# EAGLE board Open Ephys EIB Omnetics 2x32 3 fibers (EAGLE 6.4)
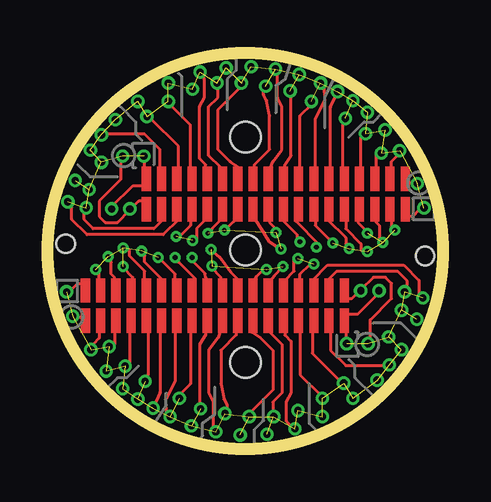
[diagram p0: board, top side]
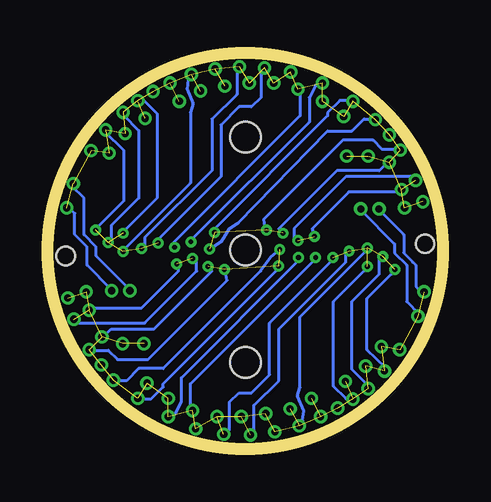
[diagram p1: board, bottom side, seen from below]

No outline drawn. Coordinates in mm, seen from the top.
Copper layers (1*16): Top 0.035mm / dielectric 1.5mm / Bottom 0.035mm
Design rules "default": minimum track width 5mil, minimum drill 10mil, track to track 5mil, track to pad 5mil, pad to pad 5mil, via to via 5mil, smd to smd 8mil, copper to edge 10mil, drill to drill 8mil, minimum pad ring 5mil, minimum via ring 5mil, stop-mask expansion 4mil, vias tented up to drill 0mil, thermal gap 10mil
Holes 1.27 mm at 11.3,22.99 11.3,27.69 11.3,18.29
Holes 0.76 mm at 3.81,23.24 18.8,22.73
Milling: area 3.1,14.7 to 19.5,31.2

## Placement (x,y rotation side)
E$1  [OMNETICS_36_AA_GS]  12.57,25.31 180 top
E$2  [OMNETICS_36_AA_GS]  10.03,20.66 0 top

## Library data of the parts
E$1 E$2 = voigts

## Tracks (layer width: path | path; a pad name or v marks a point on that pad's centre or on a via)
S$1  (via drill 0.3)
  other vias: 6.49,24.7
S$2  (via drill 0.2)  (1 unrouted)
  other vias: 8.42,23.55 9.11,23.37
S$3  (via drill 0.3)  (35 unrouted)
  other vias: 18.76,24.74 18.48,25.75 17.74,27.13 16.98,27.02 17.13,27.99 16.32,27.84 16.4,28.73 15.48,28.47 15.79,29.21 15.15,29.59 14.44,29.95 14.06,29.18 13.55,30.3 13.17,29.61 12.56,30.53 12.15,29.82 11.54,30.63 11.14,29.95 10.5,30.58 10.12,29.95 9.41,30.4 9.11,29.69 8.09,29.95 8.09,29.18 6.82,29.18 7.2,28.55 5.88,28.42 5.3,27.79 4.84,27.15 5.3,26.64 4.2,25.88 4.79,25.5 3.9,24.99 4.66,24.74 6.18,26.9 7.07,26.9
S$4  (via drill 0.2)  (5 unrouted)
  other vias: 17.54,23.81 16.39,23.68 17.03,23.3 16.39,22.92 15.63,23.04 14.95,23.27
S$5  (via drill 0.2)
  other vias: 14.26,23.09
S$6  (via drill 0.3)
  other vias: 5.73,24.7
S$7
  Top 0.127: 7.11,26.29 7.11,26.92
S$8
  Top 0.127: 6.1,26.8 6.1,25.91 5.21,25.02 5.21,24.38 5.46,24.13 5.97,24.13 6.48,24.64
S$9  (via drill 0.3)
  other vias: 16.88,21.28
S$10
  Top 0.127: 11.73,24.23 11.96,23.88 12.29,23.34 12.78,23.01
S$11
  Top 0.127: 12.32,24.26 12.32,24.13 12.7,23.75 12.65,23.7
S$12
  Top 0.127: 12.83,24.26 13.46,23.62 13.46,23.37
S$13
  Top 0.127: 13.41,24.18 14.35,23.24
S$14
  Top 0.127: 14.22,24.26 14.22,24 14.86,23.37 14.99,23.37
S$15
  Top 0.127: 10.92,24.26 10.79,24.16 10.54,23.9 10.49,23.8
S$16
  Top 0.127: 10.29,24.26 9.91,23.88 9.83,23.72
S$17  (via drill 0.3)
  other vias: 16.12,21.28
S$18  (via drill 0.2)  (1 unrouted)
  other vias: 14.16,22.4 13.5,22.63
S$19
  Top 0.127: 9.65,24.26 9.27,23.88 9.27,23.37
S$20  (via drill 0.2)
  other vias: 9.08,22.68
S$21
  Top 0.127: 9.02,24.26 9.02,24 8.59,23.57
S$22  (via drill 0.2)
  other vias: 8.37,22.68
S$23  (via drill 0.2)  (5 unrouted)
  other vias: 5.07,22.17 6.21,22.3 5.58,22.7 6.21,23.06 6.97,22.93 7.66,22.68
S$24
  Top 0.127: 8.51,24.26 7.87,23.62 4.7,23.62 4.06,24.26 4.06,24.89
S$25
  Top 0.127: 14.73,24.26 15.49,23.5 15.49,23.24
S$26
  Top 0.127: 7.87,24.26 7.49,23.88 4.95,23.88 4.57,24.26 4.57,24.51
S$27  (via drill 0.2)  (3 unrouted)
  other vias: 9.92,22.32 9.87,23.01 12.18,22.17 12.87,22.3
S$28  (via drill 0.3)  (35 unrouted)
  other vias: 3.85,21.24 4.1,20.22 4.86,18.82 5.63,18.95 5.5,17.93 6.29,18.14 6.18,17.2 7.12,17.5 6.82,16.77 7.45,16.38 8.17,16.03 8.55,16.79 9.05,15.65 9.44,16.36 10.07,15.39 10.45,16.16 11.09,15.27 11.47,16.03 12.2,15.29 12.48,16.03 13.37,15.52 13.5,16.28 14.52,16.03 14.52,16.79 15.79,16.79 15.4,17.43 16.8,17.55 17.31,18.19 17.82,18.82 17.28,19.36 18.45,20.09 17.82,20.47 18.71,20.98 17.95,21.24 16.42,19.08 15.53,19.08
S$29
  Top 0.127: 18.54,24.64 18.29,24.38 18.03,24.38
S$30
  Top 0.127: 18.54,25.78 18.03,25.78
S$31
  Top 0.127: 11.05,21.72 10.69,22.07 10.24,22.68 9.88,22.99
S$32
  Top 0.127: 10.29,21.72 10.29,21.84 9.91,22.23 9.91,22.48
S$33
  Top 0.127: 9.78,21.72 9.65,21.84 9.63,22 9.12,22.5
S$34
  Top 0.127: 9.22,21.77 8.51,22.48
S$35
  Top 0.127: 8.38,21.72 8.38,21.97 7.75,22.61 7.62,22.61
S$36
  Top 0.127: 11.68,21.72 11.79,21.89 12.04,22.15 12.14,22.2
S$37
  Top 0.127: 12.17,21.49 12.52,21.92 12.85,22.28
S$38
  Top 0.127: 12.95,21.72 13.34,22.1 13.34,22.61
S$39
  Top 0.127: 13.59,21.72 13.59,21.97 14.02,22.4
S$40
  Top 0.127: 14.1,21.72 14.73,22.35 17.91,22.35 18.54,21.72 18.54,21.08
S$41
  Top 0.127: 7.87,21.72 7.11,22.48 7.11,22.73
S$42
  Top 0.127: 14.73,21.72 15.11,22.1 17.65,22.1 18.03,21.72 18.03,21.46
S$43
  Top 0.127: 4.06,21.34 4.32,21.59 4.57,21.59
S$44  (via drill 0.2)  (3 unrouted)
  other vias: 12.59,23.7 12.79,23.02 10.43,23.81 9.74,23.68
S$45
  Top 0.127: 4.06,20.19 4.57,20.19
S$46
  Top 0.127: 15.49,20.95 15.75,20.95 16,21.21
S$47
  Top 0.127: 7.11,21.72 7.11,22.1 6.48,22.73 6.48,22.99 6.35,23.11
S$48
  Top 0.127: 6.6,21.72 6.6,21.84 6.22,22.23
S$49
  Top 0.127: 5.84,21.72 5.84,21.84 5.71,21.97 5.71,22.48
S$50
  Top 0.127: 5.21,21.72 5.21,22.1
S$51
  Top 0.127: 5.21,19.68 5.21,19.3 4.95,19.05
S$52
  Top 0.127: 5.84,19.68 5.84,19.05 5.71,18.92
S$53
  Top 0.127: 6.48,19.81 6.48,18.29 6.35,18.16
S$54
  Top 0.127: 7.24,19.56 7.24,17.78 6.99,17.53
S$55
  Top 0.127: 7.75,19.68 7.75,17.04 7.47,16.43
S$56
  Top 0.127: 8.38,19.56 8.38,17.53 7.98,16.74 8,16.13
S$57
  Top 0.127: 9.02,19.56 9.02,17.4 8.51,16.89
S$58
  Top 0.127: 9.65,19.68 9.65,19.43 9.4,19.05 9.4,16.64 9.53,16.38
S$59
  Top 0.127: 10.29,19.68 10.16,19.3 9.78,18.8 9.78,17.02 9.96,16.64 9.96,15.49
S$60
  Top 0.127: 10.92,19.68 10.92,19.43 10.29,18.8 10.29,17.4 10.41,16.76 10.54,16.51 10.54,16.26
S$61
  Top 0.127: 11.56,19.56 11.94,19.3 12.45,18.8 12.45,17.14 11.56,16.26
S$62
  Top 0.127: 12.32,19.56 12.83,19.05 12.83,17.02 12.45,16.64 12.45,16.13
S$63
  Top 0.127: 12.83,19.68 12.95,19.68 12.95,19.43 13.21,19.18 13.21,17.02 13.01,16.64 13.01,15.88 13.21,15.62
S$64
  Top 0.127: 13.59,19.56 13.59,17.78 14.48,16.89
S$65
  Top 0.127: 14.1,19.68 14.1,18.67 15.24,17.53
S$66
  Top 0.127: 14.86,19.56 14.86,18.8 15.49,18.16 17.14,18.16
S$67
  Bottom 0.127: 5.44,18.06 6.22,18.82 6.22,20.95 5.21,21.97
S$68
  Top 0.127: 9.02,26.42 9.02,28.19 8.13,29.08
S$69
  Top 0.127: 7.11,25.02 6.86,25.02 6.6,24.77
S$70
  Bottom 0.127: 6.22,17.27 6.22,17.37 6.86,18.01 6.86,20.83 5.71,21.97 5.71,22.61
S$71
  Bottom 0.127: 6.86,16.79 7.11,16.79 7.62,17.3 7.62,20.83 6.22,22.23
S$72
  Top 0.127: 15.49,24.26 15.49,23.88 16.13,23.24 16.13,22.99 16.26,22.86
S$73
  Top 0.127: 16,24.26 16,24.13 16.38,23.75
S$74
  Top 0.127: 16.76,24.26 16.76,24.13 16.89,24 16.89,23.5
S$75
  Top 0.127: 17.4,24.26 17.4,23.88
S$76
  Top 0.127: 17.4,26.29 17.4,26.67 17.65,26.92
S$77
  Top 0.127: 16.76,26.29 16.76,26.92 16.89,27.05
S$78
  Top 0.127: 16.13,26.16 16.13,27.69 16.26,27.81
S$79
  Top 0.127: 15.37,26.42 15.37,28.19 15.62,28.45
S$80
  Top 0.127: 14.86,26.29 14.86,28.93 15.14,29.54
S$81
  Top 0.127: 14.22,26.42 14.22,28.45 14.63,29.23 14.61,29.84
S$82
  Top 0.127: 13.59,26.42 13.59,28.57 14.1,29.08
S$83
  Top 0.127: 12.95,26.29 12.95,26.54 13.21,26.92 13.21,29.34 13.08,29.59
S$84
  Top 0.127: 12.32,26.29 12.45,26.67 12.83,27.18 12.83,28.96 12.65,29.34 12.65,30.48
S$85
  Bottom 0.127: 9.02,15.88 8.91,15.88 8.87,16.28 9.12,16.89 9.02,17.25 9.02,20.19 6.22,22.99
S$86
  Top 0.127: 11.68,26.29 11.68,26.54 12.32,27.18 12.32,28.57 12.19,29.21 12.06,29.46 12.06,29.72
S$87
  Top 0.127: 11.05,26.42 10.67,26.67 10.16,27.18 10.16,28.83 11.05,29.72
S$88
  Top 0.127: 10.29,26.42 9.78,26.92 9.78,28.96 10.16,29.34 10.16,29.84
S$89
  Top 0.127: 9.78,26.29 9.65,26.29 9.65,26.54 9.4,26.8 9.4,28.96 9.6,29.34 9.6,30.1 9.4,30.35
S$90
  Top 0.127: 8.51,26.29 8.51,27.3 7.37,28.45
S$91
  Top 0.127: 7.75,26.42 7.75,27.18 7.11,27.81 5.46,27.81
S$92
  Bottom 0.127: 10.95,15.37 10.95,16.51 9.91,17.53 9.91,19.68 7.11,22.48 7.11,22.86
S$93
  Bottom 0.127: 17.17,27.91 16.38,27.15 16.38,25.02 17.4,24
S$94
  Bottom 0.127: 16.38,28.7 16.38,28.6 15.75,27.96 15.75,25.15 16.89,24 16.89,23.37
S$95
  Bottom 0.127: 15.75,29.18 15.49,29.18 14.99,28.68 14.99,25.15 16.38,23.75
S$96
  Bottom 0.127: 13.59,30.1 13.69,30.1 13.74,29.69 13.49,29.08 13.59,28.73 13.59,25.78 16.38,22.99
S$97
  Bottom 0.127: 11.66,30.61 11.66,29.46 12.7,28.45 12.7,26.29 15.49,23.5 15.49,23.11
S$98
  Bottom 0.127: 10.54,30.61 10.64,30.48 10.64,29.34 11.05,28.96 11.56,28.96 12.32,28.19 12.32,26.04 14.99,23.37
S$99
  Bottom 0.127: 9.02,29.72 9.02,28.57 14.33,23.27
S$100
  Bottom 0.127: 8.26,29.84 8.38,29.84 8.64,29.34 8.64,28.32 13.59,23.37
S$101
  Bottom 0.127: 6.99,29.21 7.37,29.21 7.87,28.7 7.87,28.57 12.7,23.75 12.62,23.67
S$102
  Bottom 0.127: 5.84,28.45 6.35,28.45 6.86,27.94 7.87,27.94 11.61,24.11 11.96,23.88 12.29,23.34 12.78,23.01
S$103
  Top 0.127: 7.11,25.65 6.6,25.65 5.71,24.77
S$104
  Bottom 0.127: 12.06,15.37 11.96,15.49 11.96,16.64 11.56,17.02 11.05,17.02 10.29,17.78 10.29,19.94 7.62,22.61
S$105
  Bottom 0.127: 4.95,25.4 6.99,25.4 8.51,23.88 8.51,23.62
S$106
  Bottom 0.127: 4.32,26.04 7.11,26.04 9.27,23.88 9.27,23.37
S$107
  Bottom 0.127: 10.49,23.8 10.54,24.26 7.24,27.56 5.97,27.56 5.59,27.18 4.95,27.18
S$108
  Bottom 0.127: 5.46,26.54 5.71,26.29 7.49,26.29 9.91,23.88 9.83,23.72
S$109
  Bottom 0.127: 13.59,16.26 13.59,17.4 8.51,22.48
S$110
  Bottom 0.127: 14.35,16.13 14.22,16.13 13.97,16.64 13.97,17.65 9.02,22.61
S$111
  Bottom 0.127: 15.62,16.76 15.24,16.76 14.73,17.27 14.73,17.4 9.91,22.23 9.91,22.48
S$112
  Bottom 0.127: 12.14,22.2 12.06,21.72 15.37,18.41 16.64,18.41 17.02,18.8 17.65,18.8
S$113
  Top 0.127: 15.49,20.32 16,20.32 16.89,21.21
S$114
  Bottom 0.127: 17.65,20.57 15.62,20.57 14.1,22.1 14.1,22.35
S$115
  Bottom 0.127: 18.29,19.94 15.49,19.94 13.34,22.1 13.34,22.61
S$116
  Bottom 0.127: 16.76,17.53 16.26,17.53 15.75,18.03 14.73,18.03 10.67,22.1 10.24,22.68 9.88,22.99
S$117
  Bottom 0.127: 17.14,19.43 16.89,19.68 15.11,19.68 12.7,22.1 12.85,22.25
S$118
  Top 0.127: 15.49,19.68 15.49,19.05
S$119
  Bottom 0.127: 6.48,24.64 5.08,23.24 5.08,22.86 4.57,22.35
S$120
  Bottom 0.127: 5.71,24.64 4.7,23.62 4.7,22.86 4.32,22.48
S$121
  Bottom 0.127: 17.53,22.73 17.53,23.11 18.03,23.62 18.03,25.15 18.54,25.65 18.54,25.78
S$122
  Bottom 0.127: 17.91,23.11 18.41,23.62 18.41,24.51 18.67,24.77
S$123  (via drill 0.2)
  other vias: 13.58,23.32
S$124
  Top 0.127: 16.51,19.18 16.51,20.07 17.4,20.95 17.4,21.59 17.14,21.84 16.64,21.84 16.13,21.34
S$125
  Bottom 0.127: 16.13,21.34 17.53,22.73 17.53,23.11 18.03,23.62
S$126
  Bottom 0.127: 16.89,21.34 17.91,22.35 17.91,23.11 18.29,23.5
S$127
  Bottom 0.127: 5.08,23.24 5.08,22.86 4.57,22.35 4.57,20.83 4.06,20.32 4.06,20.19
S$128
  Bottom 0.127: 4.7,22.86 4.19,22.35 4.19,21.46 3.94,21.21

## Text on the board
tDocu: 4 | eib | 8 | A | 16tt | 1 | 9 | 1 | 6 | flex | B | Drive | 1 | 2